# EAGLE board buck (EAGLE 9.6.0)
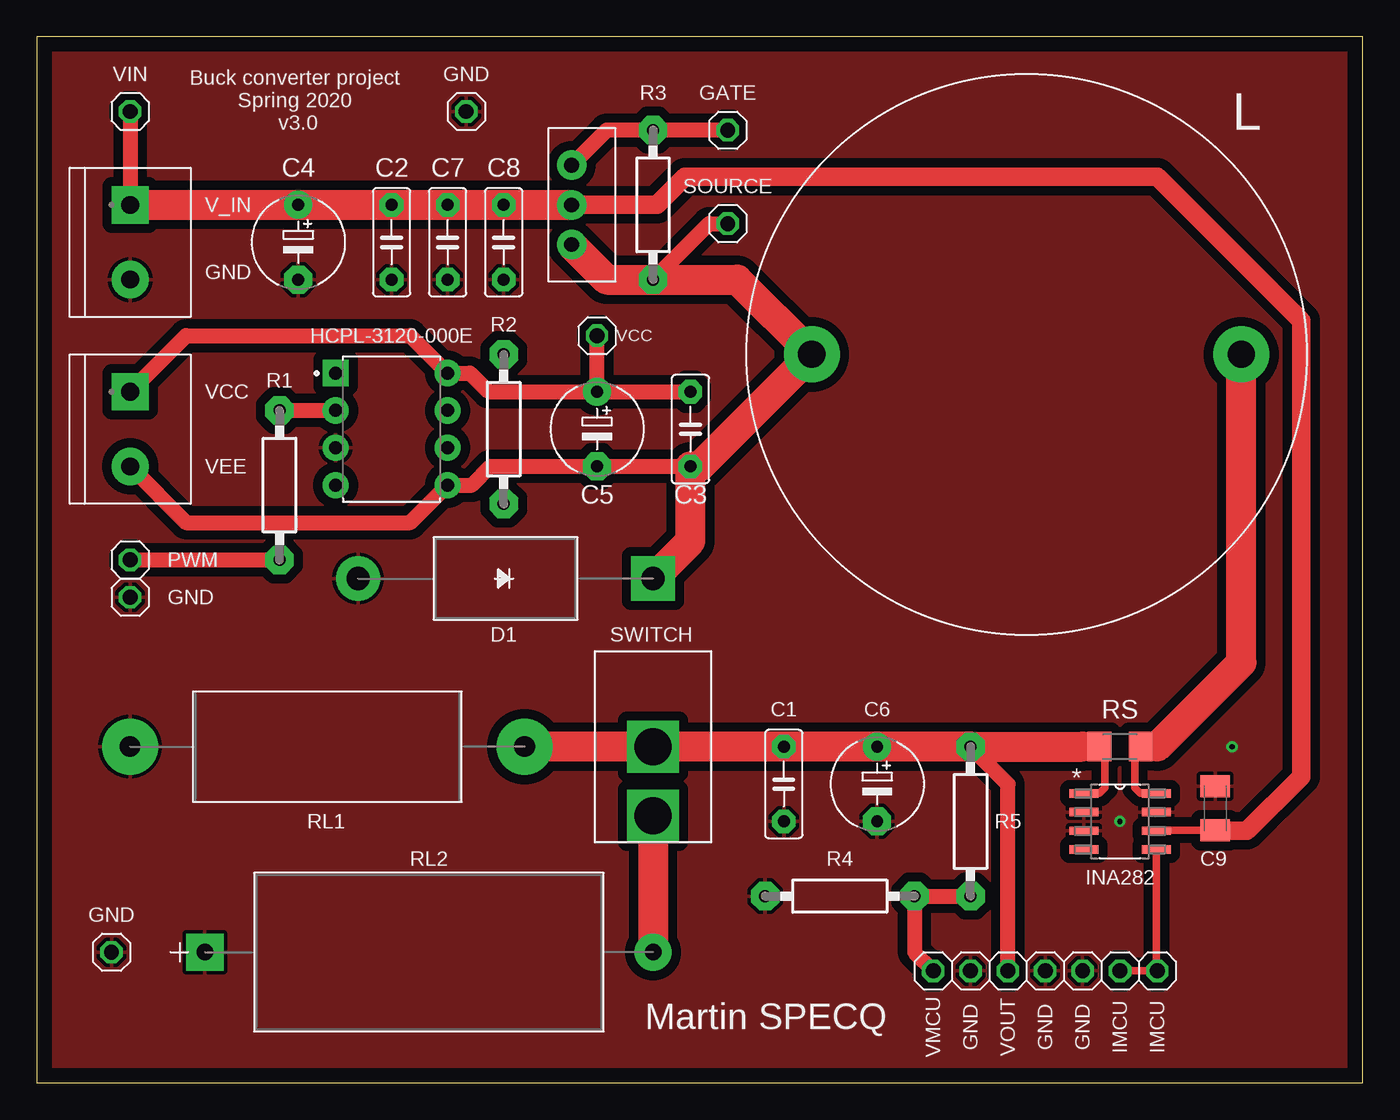
[diagram p0: board, top side]
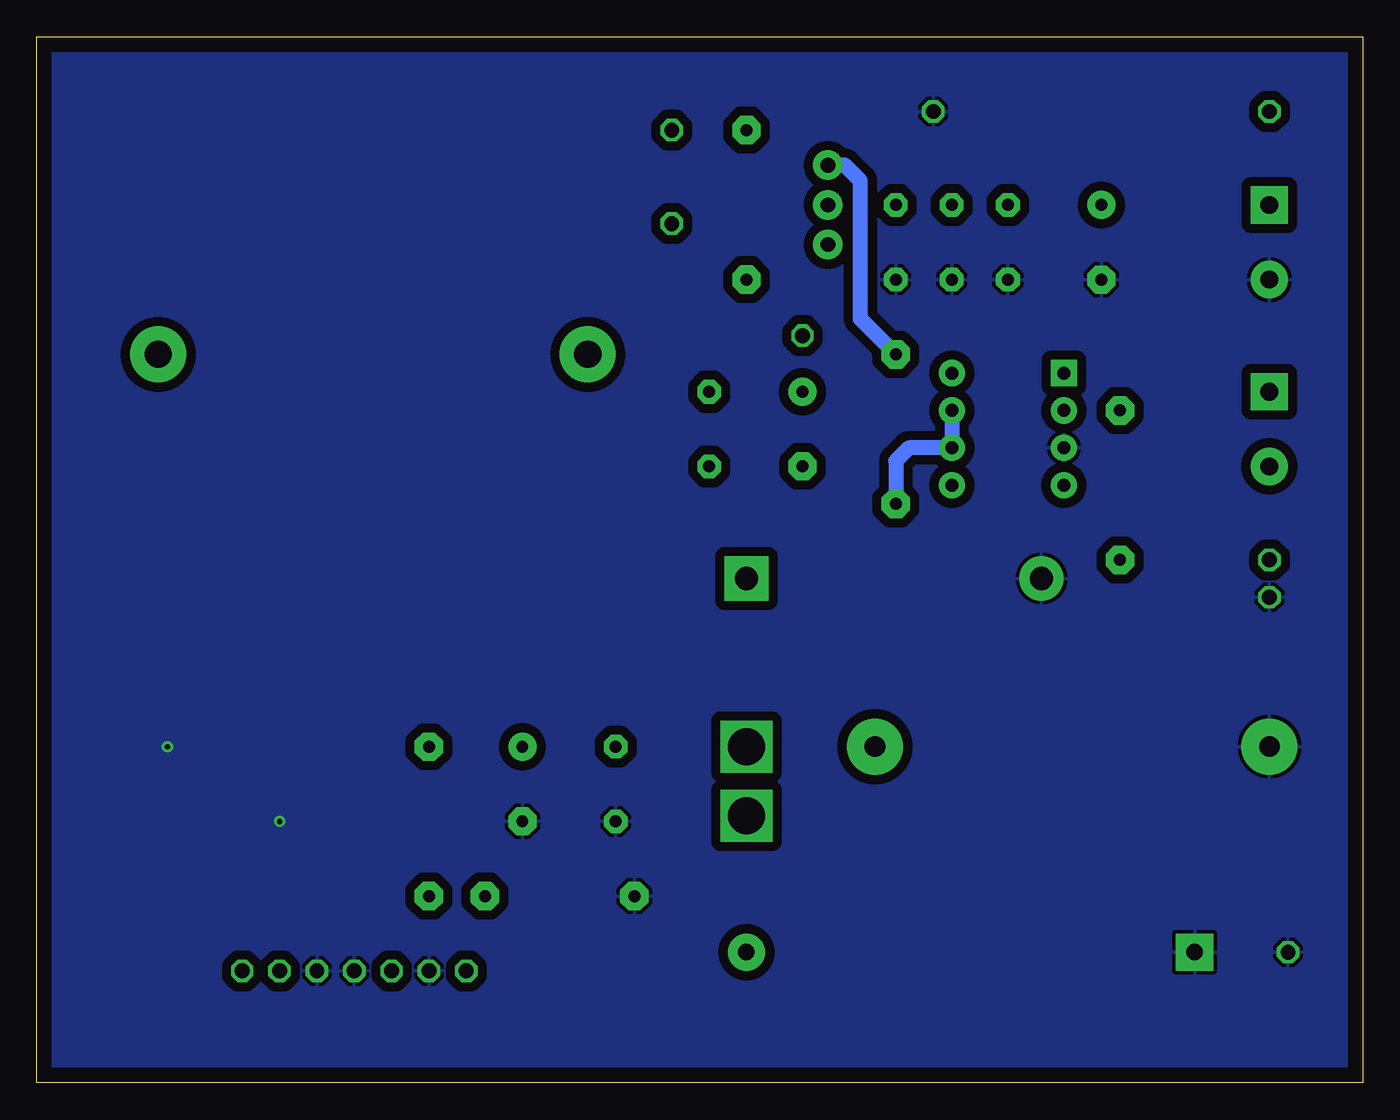
[diagram p1: board, bottom side, seen from below]

Size 90.17 x 71.12 mm. Coordinates in mm from the lower left corner, seen from the top.
Outline: 0,0 90.17,0 90.17,71.12 0,71.12 0,0
Copper layers (1*16): Top 0.035mm / dielectric 1.5mm / Bottom 0.035mm
Design rules "default *": minimum track width 6mil, minimum drill 0.35mm, track to track 10mil, track to pad 10mil, pad to pad 10mil, via to via 10mil, smd to smd 10mil, copper to edge 40mil, drill to drill 6mil, minimum pad ring 10mil, minimum via ring 8mil, stop-mask expansion 4mil, vias tented up to drill 0mil, thermal gap 10mil

## Footprints (pad centres in the part's own frame; a part is rotated, then mirrored left to right if it is on the bottom)
C5B2.5 = drill 0.813 pad 1.6 octagon: 1 -2.54,0; 2 2.54,0
E5-6 = drill 0.813 pad 1.905: + -2.54,0 | drill 0.813 pad 1.905 octagon: - 2.54,0
C1206K = smd 1.5 x 2: 1 -1.5,0; 2 1.5,0
DIODE_DO-201AD = drill 1.575 pad 3 square: 1 0,0 | drill 1.575 pad 3: 2 20.066,0
1X01 = drill 1.016 octagon: 1 0,0
TE_282837-2 = drill 1.2 pad 2.54 square: 1 -2.54,0 | drill 1.2 pad 2.54: 2 2.54,0
INDRD2921W163D3810H2616P = drill 1.85 pad 3.81: 1 -14.605,0; 2 14.605,0
0207/10C = drill 0.813 pad 1.93 octagon: 1 -5.08,0; 2 5.08,0
RES_AC05 = drill 1.397 pad 3.81: 1 0,0; 2 26.822,0
YAG_SQP500 = drill 1.118 pad 2.54 square: 1 0,0 | drill 1.118 pad 2.54: 2 30.48,0
M1206 = smd 1.6 x 2: 1 -1.4,0; 2 1.4,0
MOSFET = drill 1 pad 2: D 0,-3; G -2.7,-3; S 2.7,-3
DIP762W65P254L990H470Q8 = drill 0.88 pad 1.778 square: 1 -3.81,3.81 | drill 0.88 pad 1.778: 2 -3.81,1.27; 3 -3.81,-1.27; 4 -3.81,-3.81; 5 3.81,-3.81; 6 3.81,-1.27; 7 3.81,1.27; 8 3.81,3.81
D8 = smd 1.981 x 0.559: 1 -2.464,1.905; 2 -2.464,0.635; 3 -2.464,-0.635; 4 -2.464,-1.905; 5 2.464,-1.905; 6 2.464,-0.635; 7 2.464,0.635; 8 2.464,1.905
ON_OFF = drill 2.5 square: P$1 0,0; P$2 4.7,0

## Placement (x,y rotation side)
C1  100n  [C5B2.5]  50.8,20.32 270 top
C2  100n  [C5B2.5]  24.13,57.15 270 top
C3  100n  [C5B2.5]  44.45,44.45 270 top
C4  100u  [E5-6]  17.78,57.15 270 top
C5  100u  [E5-6]  38.1,44.45 270 top
C6  56u  [E5-6]  57.15,20.32 270 top
C7  10n  [C5B2.5]  27.94,57.15 270 top
C8  1n  [C5B2.5]  31.75,57.15 270 top
C9  100n  [C1206K]  80.14,18.67 90 top
D1  [DIODE_DO-201AD]  41.91,34.29 180 top
GATE  [1X01]  46.99,64.77 0 top
GDRVR  [TE_282837-2]  6.35,44.45 270 top
GND  [1X01]  5.08,8.89 0 top
GND2  [1X01]  29.21,66.04 0 top
L  10m  [INDRD2921W163D3810H2616P]  67.31,49.53 0 top
R1  1k  [0207/10C]  16.51,40.64 90 top
R2  100  [0207/10C]  31.75,44.45 90 top
R3  10k  [0207/10C]  41.91,59.69 90 top
R4  22k  [0207/10C]  54.61,12.7 0 top
R5  56k  [0207/10C]  63.5,17.78 90 top
R7  [1X01]  66.04,7.62 0 top
R9  [1X01]  6.35,35.56 0 top
R10  [1X01]  6.35,33.02 0 top
R11  [1X01]  71.12,7.62 0 top
R12  [1X01]  68.58,7.62 0 top
R13  [1X01]  63.5,7.62 0 top
R14  [1X01]  76.2,7.62 0 top
R15  [1X01]  73.66,7.62 0 top
RL1  100  [RES_AC05]  6.35,22.86 0 top
RL2  100  [YAG_SQP500]  11.43,8.89 0 top
RS  150m  [M1206]  73.66,22.86 0 top
SOURCE  [1X01]  46.99,58.42 0 top
T  MOSFETMOSFET  [MOSFET]  39.37,59.69 270 top
U1  HCPL-3120-000E  [DIP762W65P254L990H470Q8]  24.13,44.45 0 top
U2  INA282AID  [D8]  73.66,17.78 0 top
U$1  ON_OFF  [ON_OFF]  41.91,22.86 270 top
V_IN  [TE_282837-2]  6.35,57.15 270 top
VCC  [1X01]  38.1,50.8 0 top
VIN  [1X01]  6.35,66.04 0 top
VMCU  [1X01]  60.96,7.62 0 top

## Library data of the parts
C1-C3 C7 C8 R1-R5 T U$1 = buck_converter
C4-C6 = buck_converter; SPICEPREFIX: C
C9 RS = adafruit
D1 = buck_converter; BUILT_BY: EMA_UL_Team; MANUFACTURER_PART_NUMBER: SB340-E3/54; VENDOR: Vishay
GATE GND GND2 R7 R9-R15 SOURCE VCC VIN VMCU = pinhead
GDRVR V_IN = buck_converter; COMMENT: 282837-2; DESCRIPTION: Connector Terminal Blocks Receptacle 2 Position 5.08mm Solder Straight Thru-Hole 13.5A/Contact; DIGI-KEY_PART_NUMBER: A113320-ND; DIGI-KEY_PURCHASE_URL: https://www.digikey.fr/product-detail/en/te-connectivity-amp-connectors/282837-2/A113320-ND/2187973?utm_source=snapeda&utm_medium=aggregator&utm_campaign=symbol; MF: TE Connectivity; MP: 282837-2; PACKAGE: None; TE_PURCHASE_URL: https://www.te.com/usa-en/product-282837-2.html?te_bu=Cor&te_type=disp&te_campaign=seda_glo_cor-seda-global-disp-prtnr-fy19-seda-model-bom-cta_sma-317_1&elqCampaignId=32493
L = buck_converter; DESCRIPTION: 10mH Unshielded Wirewound Inductor 1A 2.76Ohm Max Radial, Vertical Cylinder; DIGI-KEY_PART_NUMBER: M8386-ND; DIGI-KEY_PURCHASE_URL: https://www.digikey.fr/product-detail/en/bourns-inc/1140-103K-RC/M8386-ND/774926?utm_source=snapeda&utm_medium=aggregator&utm_campaign=symbol; MF: Bourns; MP: 1140-103K-RC; PACKAGE: Radial Bourns
RL1 = buck_converter; BUILT_BY: EMA_UL_Team; MANUFACTURER_PART_NUMBER: AC05000001000JAC00; VENDOR: Vishay
RL2 = buck_converter; BUILT_BY: EMA_UL_Team; MANUFACTURER_PART_NUMBER: SQP500JB-22R; VENDOR: Yageo
U1 = buck_converter; DESCRIPTION: 2.5A Gate Driver Optical Coupling 3750Vrms 1 Channel 8-DIP; DIGI-KEY_PART_NUMBER: 516-1476-5-ND; DIGI-KEY_PURCHASE_URL: https://www.digikey.com/product-detail/en/broadcom-limited/HCPL-3120-000E/516-1476-5-ND/669903?utm_source=snapeda&utm_medium=aggregator&utm_campaign=symbol; MF: Broadcom Limited; MP: HCPL-3120-000E; PACKAGE: DIP-8 Avago
U2 = buck_converter; DATASHEET_URL: http://www.ti.com/lit/gpn/INA282; DESCRIPTION: Wide Common Mode Range, Bidirectional, High Accuracy Current Shunt Monitor; FAMILY_NAME: CURRENT SHUNT MONITOR; GENERIC_PART_NUMBER: INA282; INDUSTRY_STD_PKG_TYPE: SOIC; MANUFACTURER: Texas Instruments; MANUFACTURER_PART_NUMBER: INA282AID; PACKAGE_DESIGNATOR: D; PIN_COUNT: 8; VENDOR: Texas Instruments

## Nets
G: GATE.1 R2.2 R3.2 T.G
GND: C1.2 C2.2 C4.- C6.- C7.2 C8.2 C9.2 D1.2 GND2.1 GND.1 R4.1 R10.1 R11.1 R12.1 R13.1 RL1.1 RL2.1 U1.3 U2.2 U2.3 U2.7 V_IN.2
IMCU: R14.1 R15.1 U2.5
IND: L.2 RS.2 U2.8
N$2: R2.1 U1.6 U1.7
N$3: R1.2 U1.2
N$4: RL2.2 U$1.P$2
PWM: R1.1 R9.1
VCC: C3.1 C5.+ GDRVR.1 U1.8 VCC.1
VEE: C3.2 C5.- D1.1 GDRVR.2 L.1 R3.1 SOURCE.1 T.S U1.5
VIN: C2.1 C4.+ C7.1 C8.1 C9.1 T.D U2.6 V_IN.1 VIN.1
VMCU: R4.2 R5.1 VMCU.1
VOUT: C1.1 C6.+ R5.2 R7.1 RL1.2 RS.1 U2.1 U$1.P$1

## Tracks (layer width: path | path; a pad name or v marks a point on that pad's centre or on a via)
G
  Top 1.016: GATE.1 R3.2 38.75,64.77 T.G
  Bottom 1.016: R2.2 34.16,51.94 34.16,61.34 35.21,62.39 T.G
GND  (via drill 0.35)
  other vias: 73.66,17.78 81.28,22.86
  pour Bottom (isolate 0.635): 0,71.12 0,0 90.17,0 90.17,71.12
  pour Top (isolate 0.635): 0,0 0,71.12 90.17,71.12 90.17,0
IMCU
  Top 0.508: U2.5 76.12,7.7 R14.1 R15.1
IND
  Top 0.508: U2.8 75.06,19.68 74.68,20.07 74.68,22.48 RS.2 76.2,22.86
  Top 2.032: 76.2,22.86 81.92,28.57 L.2
N$2
  Bottom 1.016: R2.1 31.75,42.29 30.86,43.18 U1.6 U1.7
N$3
  Top 1.016: R1.2 U1.2
N$4
  Top 2.032: U$1.P$2 RL2.2
PWM
  Top 1.016: R9.1 R1.1
VCC
  Top 1.016: C5.+ VCC.1 | GDRVR.1 10.16,50.8 25.4,50.8 U1.8 29.46,48.26 30.73,46.99 C5.+ | C5.+ C3.1
VEE
  Top 1.016: GDRVR.2 10.16,38.1 25.4,38.1 U1.5 29.59,40.64 30.86,41.91 C5.- C3.2 | R3.1 45.72,58.42 SOURCE.1
  Top 2.032: T.S 38.75,54.61 R3.1 47.62,54.61 L.1 45.09,41.91 C3.2 44.45,36.83 D1.1
VIN
  Top 0.508: C9.1 76.15,17.17 U2.6
  Top 1.016: VIN.1 V_IN.1
  Top 1.27: C9.1 80.16,17.14 82.3,17.14 85.98,20.83 85.98,51.82 76.2,61.59 44.07,61.59 42.16,59.69 T.D
  Top 2.032: V_IN.1 C4.+ C2.1 C7.1 C8.1 T.D
VMCU
  Top 1.016: R5.1 R4.2 59.69,8.89 VMCU.1
VOUT
  Top 0.508: 71.12,22.86 RS.1 72.64,22.48 72.64,20.07 72.26,19.68 U2.1
  Top 1.016: R7.1 66.04,20.32 R5.2
  Top 2.032: 71.12,22.86 R5.2 C6.+ C1.1 U$1.P$1 RL1.2

## Text on the board
tPlace: GND | Buck converter project / Spring 2020 / v3.0 | V_IN | GND | HCPL-3120-000E | VCC | VEE | PWM | GND | SWITCH | INA282 | Martin SPECQ | VMCU | GND | VOUT | GND | GND | IMCU | IMCU